# Allegro board 2019-08-18-2.brd
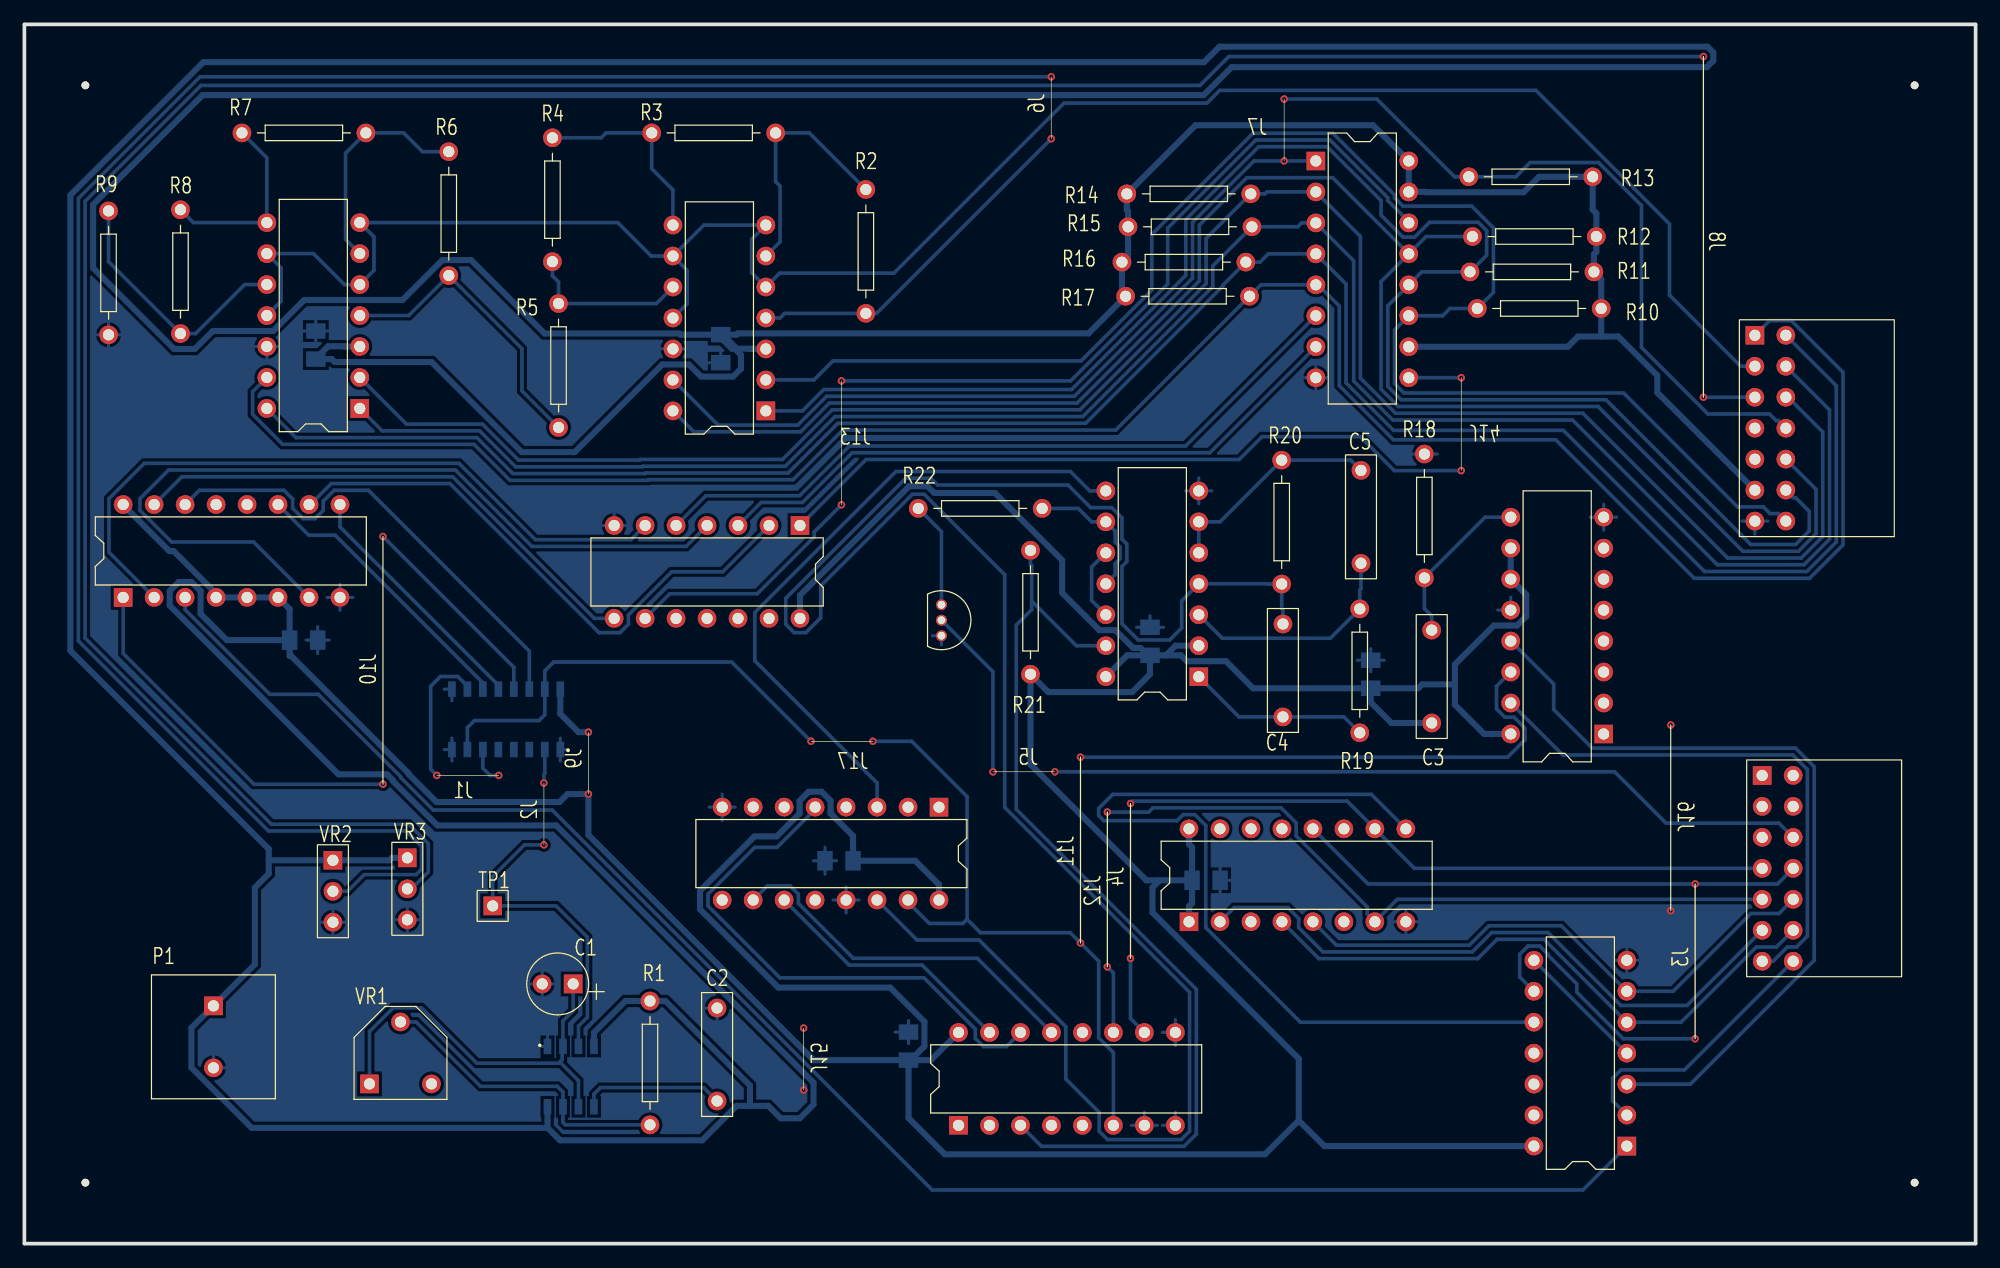
[diagram p0: board, top side]
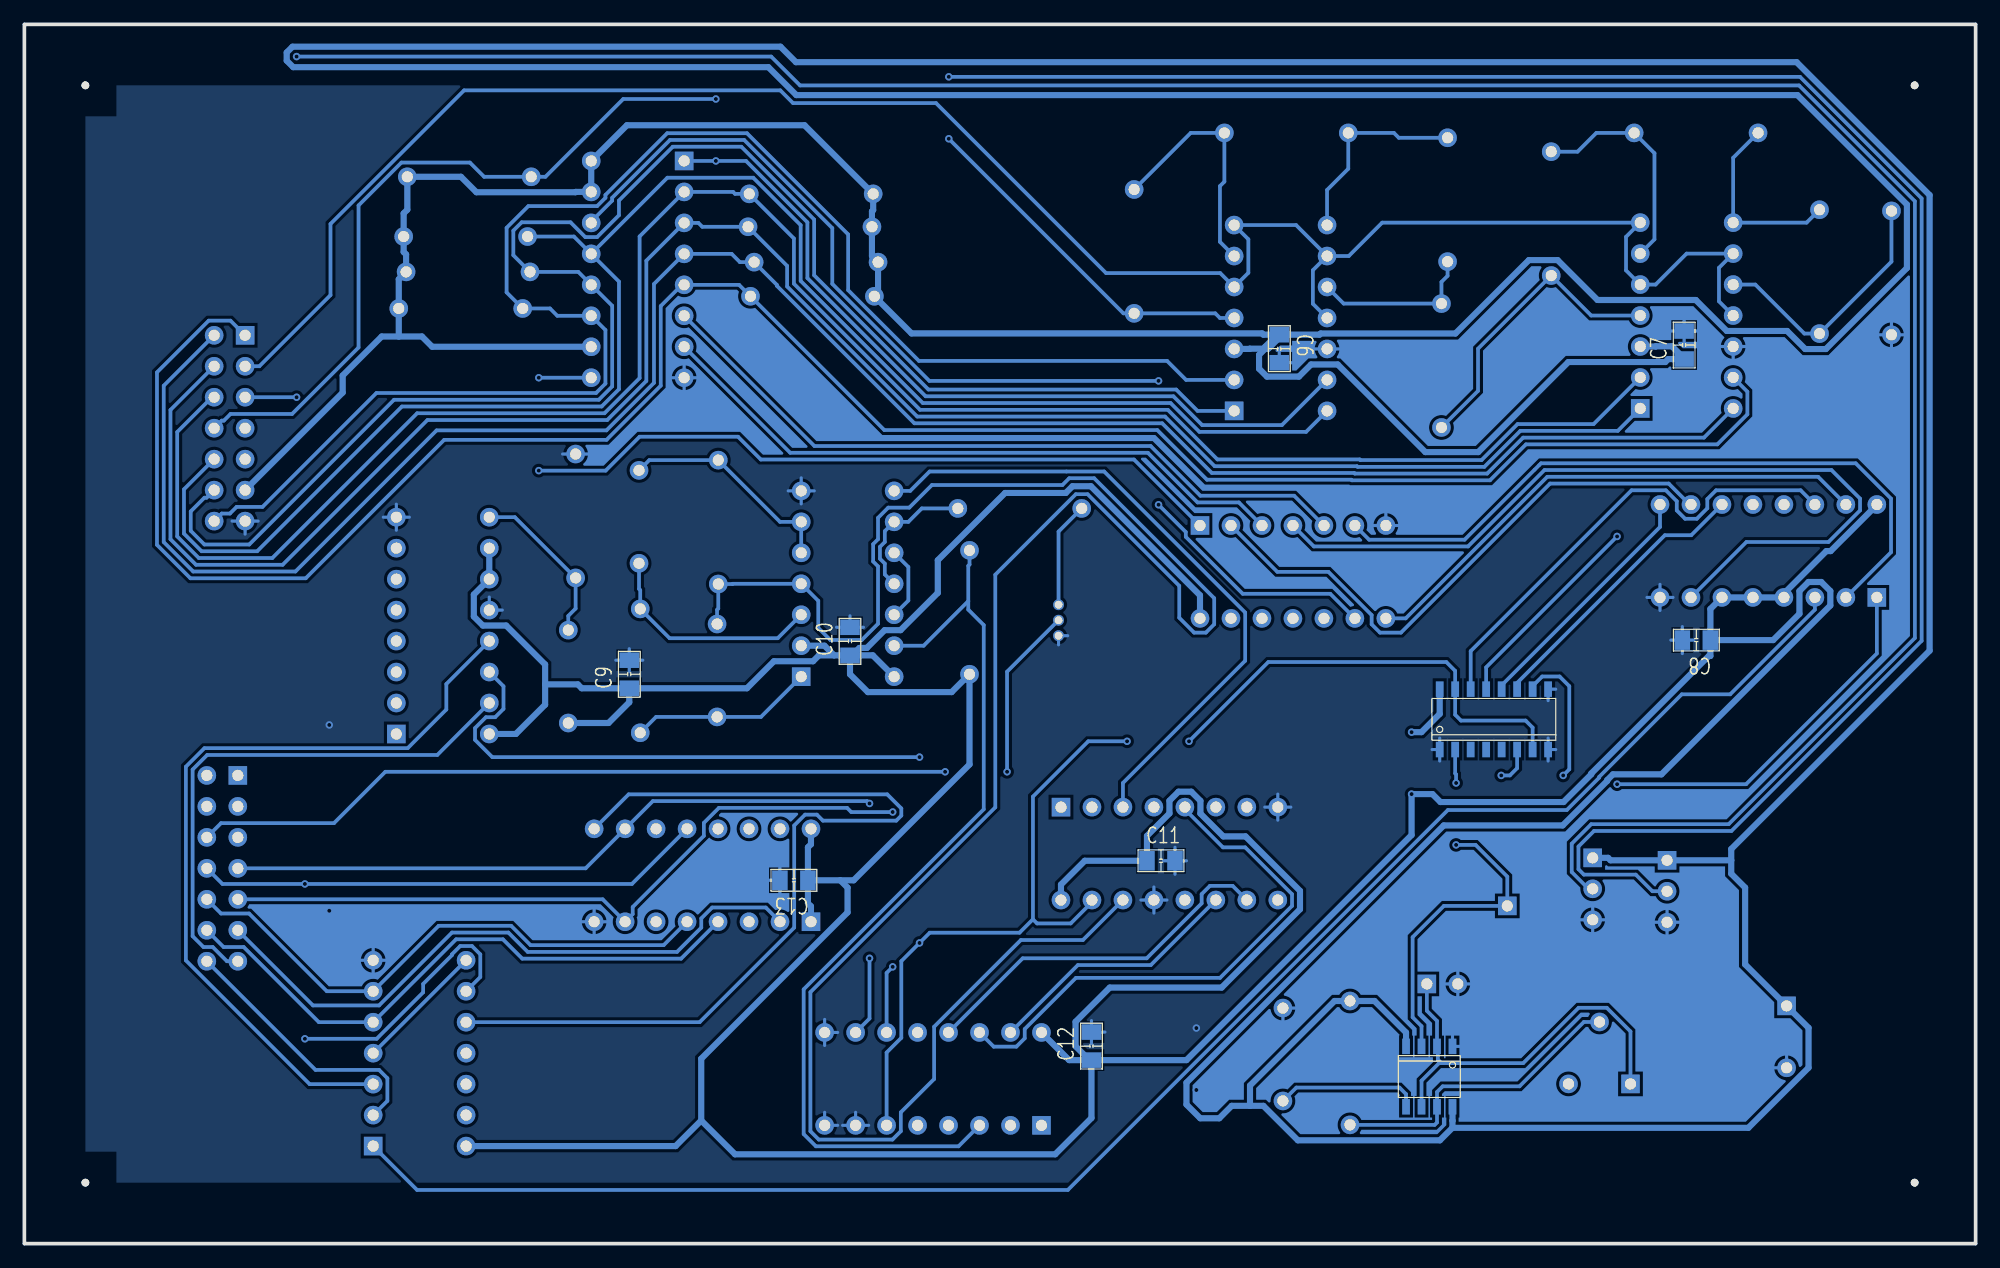
[diagram p1: board, bottom side, seen from below]

Outline 160 x 100 mm; copper layers: TOP, BOTTOM. Coordinates in mm from the lower left corner of the outline.
Outline path: 0,100 0,0 160,0 160,100 0,100

## Design rules (mm)
nets with their own width: min track width 0.5; nets +5V GND

## Placement (name value [footprint] x y rotation side)
C1  10uF  [CAP196]  45 21.3 90 top
C2  0.1uF  [CAP300]  56.8 11.7 90 top
C3  0.1uF  [CAP300]  115.4 42.7 90 top
C4  0.1uF  [CAP300]  103.2 43.2 90 top
C5  0.1uF  [CAP300]  109.6 55.8 90 top
C6  0.1uF  [SMDCAP]  57.1 74.4 270 bottom
C7  0.1uF  [SMDCAP]  23.9 72.7 90 bottom
C8  0.1uF  [SMDCAP]  21.9 49.5 0 bottom
C9  0.1uF  [SMDCAP]  110.4 45.7 90 bottom
C10  0.1uF  [SMDCAP]  92.3 48.4 90 bottom
C11  0.1uF  [SMDCAP]  67.8 31.4 180 bottom
C12  0.1uF  [SMDCAP]  72.5 15.2 90 bottom
C13  0.1uF  [SMDCAP]  95.9 29.8 0 bottom
J1  -  [1]  38.9 38.4 180 bottom
J2  -  [1]  42.6 37.78 270 bottom
J3  -  [4]  137 29.5 270 bottom
J4  -  [4]  90.7 36.1 270 bottom
J5  -  [1]  84.5 38.7 180 bottom
J6  -  [1]  84.2 95.7 270 bottom
J7  -  [1]  103.3 88.8 90 bottom
J8  -  [10]  137.68 69.42 90 bottom
J9  -  [1]  46.25 41.95 270 bottom
J10  -  [7]  29.4 58 270 bottom
J11  -  [5]  86.6 39.9 270 bottom
J12  -  [4]  88.8 35.4 270 bottom
J13  -  [3]  67 60.6 90 bottom
J14  -  [2]  117.82 71.02 270 bottom
J15  -  [1]  63.9 12.6 90 bottom
J16  -  [5]  135 27.3 90 bottom
J17  -  [1]  64.5 41.2 0 bottom
NOREF  -  [unnamed]  155 5 0 top
NOREF#2  -  [unnamed]  5 5 0 top
NOREF#3  -  [unnamed]  5 95 0 top
NOREF#4  -  [unnamed]  155 95 0 top
P1  CON2  [2P]  15.5 19.5 0 top
P2  CON14  [JUMPER14]  141.9 74.5 270 top
P3  CON14  [JUMPER14]  142.5 38.4 270 top
Q1  2SC1815  [TO92]  75.2 52.4 0 top
R1  10K  [RES400]  51.3 19.9 270 top
R2  10K  [RES400]  69 76.3 90 top
R3  10K  [RES400]  61.6 91.1 180 top
R4  10K  [RES400]  43.3 90.7 270 top
R5  10K  [RES400]  43.8 77.1 270 top
R6  10K  [RES400]  34.8 79.4 90 top
R7  10K  [RES400]  28 91.1 180 top
R8  10K  [RES400]  12.8 84.8 270 top
R9  10K  [RES400]  6.9 84.7 270 top
R10  10K  [RES400]  129.3 76.7 180 top
R11  10K  [RES400]  128.7 79.7 180 top
R12  10K  [RES400]  128.9 82.6 180 top
R13  10K  [RES400]  128.6 87.5 180 top
R14  10K  [RES400]  90.4 86.1 0 top
R15  10K  [RES400]  90.5 83.4 0 top
R16  10K  [RES400]  90 80.5 0 top
R17  10K  [RES400]  90.3 77.7 0 top
R18  10K  [RES400]  114.8 54.6 90 top
R19  10K  [RES400]  109.5 41.9 90 top
R20  10K  [RES400]  103.1 54.1 90 top
R21  10K  [RES400]  82.5 46.7 90 top
R22  10K  [RES400]  73.3 60.3 0 top
TP1  TP  [JUMPER1]  38.4 27.7 0 top
U1  NE555  [SOIC8]  44.8 13.7 270 bottom
U2  LM339  [DIP14_3]  60.8 68.3 180 top
U3  LM339  [DIP14_3]  27.5 68.5 180 top
U4  40147  [DIP16_3]  105.9 88.8 0 top
U5  4069  [DIP14_3]  63.6 58.9 270 top
U6  4518  [SOIC16]  39.5 43 90 bottom
U7  4585  [DIP16_3]  8.1 53 90 top
U8  4027  [DIP16_3]  129.5 41.8 180 top
U9  4071  [DIP14_3]  131.4 8 180 top
U10  4001  [DIP14_3]  96.3 46.5 180 top
U11  4017  [DIP16_3]  75 35.8 270 top
U12  4051  [DIP16_3]  76.6 9.7 90 top
U13  4175  [DIP16_3]  95.5 26.4 90 top
VR1  1M  [VR1]  28.3 13.1 0 top
VR2  10K  [VR2]  25.3 28.9 0 top
VR3  10K  [VR2]  31.4 29.1 0 top

## Library data of the parts
C1 = Cap POL
C2-C5 = Cap NP
C6-C13 = Cap TEXT
J1-J17 = JUMPER
P1 = CON2
P2 P3 = CON14
Q1 = 2SC1815
R1-R22 = resistor
TP1 = TP
U1 = NE555: Tolerance: ***; User Part Number: ***
U2 U3 = LM339: Tolerance: ***; User Part Number: ***
U4 = 40147: Tolerance: ***; User Part Number: ***
U5 = 4069: Tolerance: ***; User Part Number: ***
U6 = 4518: Tolerance: ***; User Part Number: ***
U7 = 4585: Tolerance: ***; User Part Number: ***
U8 = 4027: Tolerance: ***; User Part Number: ***
U9 = 4071: Tolerance: ***; User Part Number: ***
U10 = 4001: Tolerance: ***; User Part Number: ***
U11 = 4017: Tolerance: ***; User Part Number: ***
U12 = 4051: Tolerance: ***; User Part Number: ***
U13 = 4175: Tolerance: ***; User Part Number: ***
VR1 = VR1
VR2 VR3 = VR2

## Footprints (pads in the part's own frame, mm; a bottom-side part is the same pattern mirrored in y, then rotated)
2P
  rect 1.524x1.524 hole 0.914: 1(0,0)
  round 1.524 hole 0.914: 2(0,-5.08)
CAP196
  rect 1.524x1.524 hole 0.914: 1(0,0)
  round 1.524 hole 0.914: 2(0,2.54)
CAP300
  round 1.524 hole 0.914: 1(0,0) 2(7.62,0)
DIP14_3
  rect 1.524x1.524 hole 0.914: 1(0,0)
  round 1.524 hole 0.914: 2(0,-2.54) 3(0,-5.08) 4(0,-7.62) 5(0,-10.16) 6(0,-12.7) 7(0,-15.24) 8(7.62,-15.24) 9(7.62,-12.7) 10(7.62,-10.16) 11(7.62,-7.62) 12(7.62,-5.08) 13(7.62,-2.54) 14(7.62,0)
DIP16_3
  rect 1.524x1.524 hole 0.914: 1(0,0)
  round 1.524 hole 0.914: 2(0,-2.54) 3(0,-5.08) 4(0,-7.62) 5(0,-10.16) 6(0,-12.7) 7(0,-15.24) 8(0,-17.78) 9(7.62,-17.78) 10(7.62,-15.24) 11(7.62,-12.7) 12(7.62,-10.16) 13(7.62,-7.62) 14(7.62,-5.08) 15(7.62,-2.54) 16(7.62,0)
JUMPER1
  rect 1.524x1.524 hole 0.914: 1(0,0)
JUMPER14
  rect 1.524x1.524 hole 0.914: 1(0,0)
  round 1.524 hole 0.914: 2(0,2.54) 3(2.54,0) 4(2.54,2.54) 5(5.08,0) 6(5.08,2.54) 7(7.62,0) 8(7.62,2.54) 9(10.16,0) 10(10.16,2.54) 11(12.7,0) 12(12.7,2.54) 13(15.24,0) 14(15.24,2.54)
RES400
  round 1.524 hole 0.914: 1(0,0) 2(10.16,0)
SMDCAP
  rect 1.27x1.6 smd: 1(-0.15,0) 2(2.15,0)
SOIC8
  rect 1.27x0.635 smd: 1(-2.476,1.905) 2(-2.476,0.635) 3(-2.476,-0.635) 4(-2.476,-1.905) 5(2.476,-1.905) 6(2.476,-0.635) 7(2.476,0.635) 8(2.476,1.905)
SOIC16
  rect 1.27x0.635 smd: 1(-2.476,4.445) 2(-2.476,3.175) 3(-2.476,1.905) 4(-2.476,0.635) 5(-2.476,-0.635) 6(-2.476,-1.905) 7(-2.476,-3.175) 8(-2.476,-4.445) 9(2.476,-4.445) 10(2.476,-3.175) 11(2.476,-1.905) 12(2.476,-0.635) 13(2.476,0.635) 14(2.476,1.905) 15(2.476,3.175) 16(2.476,4.445)
TO92
  round 0.889 hole 0.635: 1(0,0) 2(0,-1.27) 3(0,-2.54)
unnamed
  round 0.635 hole 3.175 unplated: (0,0)
VR1
  rect 1.524x1.524 hole 0.914: 1(0,0)
  round 1.524 hole 0.914: 2(2.54,5.08) 3(5.08,0)
VR2
  rect 1.524x1.524 hole 0.914: 1(0,2.54)
  round 1.524 hole 0.914: 2(0,0) 3(0,-2.54)

## Nets
+5V: C3.1 C6.1 C7.1 C8.1 C9.1 C10.1 C11.1 C12.1 C13.1 P1.1 P2.11 R1.1 R10.1 R11.1 R12.1 R13.1 R14.1 R15.1 R16.1 R17.1 R21.1 U1.4(RST) U1.8(VCC) U2.3 U3.3 U4.10(I\9\) U4.15(I\0\) U4.16(VCC) U5.14 U6.16 U7.4(A>BIN) U7.5(A<BIN) U7.6(A=BIN) U7.16(VCC) U8.10(J) U8.11(K) U8.16 U9.14 U10.2(I1) U10.14 U11.16(VCC) U12.16(VCC) U13.1(R\S\T\) U13.16(VCC) VR2.1(A) VR3.1(A)
GND: C1.2 C2.2 C6.2 C7.2 C8.2 C9.2 C10.2 C11.2 C12.2 C13.2 P1.2 P2.13 Q1.3(B) R9.2 R18.2 U1.1(GND) U2.12 U3.12 U4.8(GND) U5.7 U6.1(CLK) U6.8 U6.9(CLK) U7.8(GND) U8.8 U8.12(RST) U9.7 U10.7 U11.8(GND) U11.13(C\K\E\N\) U12.7(VEE) U12.8(GND) U12.9(C) U13.8(GND) VR2.3(WIPER) VR3.3(WIPER)
ADC0: P2.14 R10.2 U2.2(OUT) U4.11(I\1\)
ADC1: P2.12 R11.2 U2.1(OUT) U4.12(I\2\)
ADC2: P2.10 R12.2 U2.14(OUT) U4.13(I\3\)
ADC3: P2.8 R13.2 U2.13(OUT) U4.1(I\4\)
ADC4: P2.6 R14.2 U3.2(OUT) U4.2(I\5\)
ADC5: P2.4 R15.2 U3.1(OUT) U4.3(I\6\)
ADC6: P2.2 R16.2 U3.14(OUT) U4.4(I\7\)
ADC7: P2.1 R17.2 U3.13(OUT) U4.5(I\8\)
CLK: TP1.1 U1.3(OUT) U6.2(EN)
MOTOR-GND: P3.6 Q1.2(C)
MR: U6.7(CLR) U6.15(CLR) U8.14(Q\) U11.15(RST) U12.6(E\N\)
MR2: P3.13 U8.15(Q)
SW1: P3.14 U9.2(I1)
SW2: P3.12 U9.5(I0) U13.4(D0)
SW3: P3.10 U9.6(I1) U13.5(D1)
SW4: P3.8 U9.9(I1) U13.12(D2)
SWLED1: P3.11 U13.2(Q0)
SWLED2: P3.9 U12.11(A) U13.7(Q1)
SWLED3: P3.7 U12.10(B) U13.10(Q2)
VR3: P2.5 VR3.2(B)
VR-LED: P2.3 U2.5(+IN) U2.7(+IN) U2.9(+IN) U2.11(+IN) U3.5(+IN) U3.7(+IN) U3.9(+IN) U3.11(+IN)
N01738: R2.2 R3.1 U2.6(-IN)
N01745: R2.1 U2.4(-IN) VR2.2(B)
N01788: R3.2 R4.1 U2.8(-IN)
N01863: R4.2 R5.1 U2.10(-IN)
N01938: R5.2 R6.1 U3.4(-IN)
N02013: R6.2 R7.1 U3.6(-IN)
N02099: R7.2 R8.1 U3.8(-IN)
N02959: R8.2 R9.1 U3.10(-IN)
N05183: U4.9(A\) U5.1(I)
N05210: U4.7(B\) U5.3(I)
N05222: U4.6(C\) U5.5(I)
N05234: U4.14(D\) U5.9(I)
N05246: U5.2(O) U7.10(A0)
N05283: U5.4(O) U7.7(A1)
N05295: U5.6(O) U7.2(A2)
N05307: U5.8(O) U7.15(A3)
N05494: U7.3(A=BOUT) U9.1(I0)
N05551: U6.11(Q0) U7.11(B0)
N05553: U6.12(Q1) U7.9(B1)
N05555: U6.13(Q2) U7.1(B2)
N05557: U6.14(Q3) U7.14(B3)
N06357: R1.2 U1.7(DISC) VR1.2
N06361: C1.1 U1.2(TRIG) U1.6(THR) VR1.1
N07130: U8.13(CLK) U9.3(O)
N07335: C3.2 R18.1 U8.9(SET)
N07588: C2.1 U1.5(CV)
N08311: U6.6(Q3) U6.10(EN)
N11638: C4.1 R19.1 U10.1(I0)
N11666: C4.2 R20.1 U10.4(O) U11.14(CLK)
N11691: C5.2 R20.2 U10.5(I0) U10.6(I1)
N11734: C5.1 R19.2 U10.3(O)
N11895: U11.11(9) U12.15(X2)
N11956: U11.5(6) U12.14(X1)
N11968: U11.10(4) U12.13(X0)
N11980: U10.8(I0) U11.3(0)
N12001: R21.2 U10.13(I1) U12.3(X)
N12045: U10.10(O) U10.12(I0)
N12067: R22.2 U10.9(I1) U10.11(O)
N12155: Q1.1(E) R22.1
N14271: U9.10(O) U13.9(CLK)
N14317: U9.4(O) U9.8(I0)

Pads without a net: P2 7 9; P3 1 2 3 4 5; U5 10 11 12 13; U6 3 4 5; U7 12 13; U8 1 2 3 4 5 6 7; U9 11 12 13; U11 1 2 4 6 7 9 12; U12 1 2 4 5 12; U13 3 6 11 13 14 15; VR1 3

## Via types
v1: diameter 0.61, hole 0.33, TOP to BOTTOM, 34 vias

## Routing (per net, layer and track width the routed paths; a pad name or vN(x,y) marks a point on that pad's centre or on a via; arc(x,y) is an arc through that point)
+5V: length 1176.7
  BOTTOM w0.5: U6.16 43.95,43.45 45.44,41.95 v1(46.25,41.95) ; C9.1 114.3,45.55 114.62,45.87 117.3,45.87 ; C9.1 100.75,45.55 98.53,47.77 95.33,47.77 94.84,48.25 93.6,48.25 ; C9.1 110.4,44.4 112.1,42.7 C3.1 ; 92.14,48.25 91.53,48.86 90.92,48.86 89.46,50.31 88.16,50.31 85.1,53.37 85.1,56.05 79.58,61.57 74.61,61.57 74.06,62.12 72.55,62.12 63.6,53.17 U5.14 ; 92.14,48.25 C10.1 ; 92.14,48.25 90.43,48.25 U10.14 ; U4.10 126.56,73.56 127.4,74.4 129.3,74.4 ; 20.04,31.44 20.04,30.34 18.9,29.2 18.9,22.9 P1.1 13.7,17.7 13.7,14.43 18.63,9.5 42.9,9.5 42.9,9.5 ; 20.04,31.44 20.04,32.36 3.77,48.63 3.77,86 14.68,96.9 96.73,96.9 98,98.17 138.02,98.17 138.49,97.7 138.49,97.02 137.96,96.49 98.99,96.49 96.7,94.2 14.61,94.2 5.63,85.22 5.63,80.02 12.28,73.37 13.97,73.37 15.45,74.85 20.41,74.85 22.95,77.39 31,77.39 34.27,80.67 36.63,80.67 42.65,74.65 53.7,74.65 53.8,74.55 C6.1 ; 20.04,31.44 VR2.1 29.93,31.44 30.13,31.64 VR3.1 ; 104.5,10.1 106.6,8 U9.14 ; 104.5,10.1 104.5,15.16 92.5,27.16 92.5,29.2 93.1,29.8 ; 104.5,10.1 101.73,7.33 75.47,7.33 72.5,10.3 C12.1 ; C13.1 95.75,27.92 95.5,27.67 U13.1 ; C13.1 95.75,32.5 95.5,32.75 U13.16 ; C13.1 93.1,29.8 ; 129.3,74.4 R10.1 129.3,79.1 R11.1 128.7,81.13 128.9,81.33 R12.1 128.9,84.5 128.6,84.8 R13.1 124.2,87.5 122.93,86.23 114.81,86.23 114.79,86.26 U4.15 U4.16 110.59,91.73 96.03,91.73 R14.1 90.4,84.77 90.5,84.67 R15.1 90.5,81 R16.1 90,78 R17.1 87.25,74.65 58.51,74.65 58.4,74.55 57.27,74.55 ; 129.3,74.4 130.7,74.4 133.9,71.2 133.9,69.8 P2.11 ; 117.3,45.87 117.3,44.2 119.7,41.8 U8.16 ; 117.3,45.87 117.3,47.5 120.49,50.69 122.41,50.69 123.15,51.44 123.15,53.23 U8.11 U8.10 ; C12.1 72.67,15.05 ; C12.1 64.71,15.05 46.25,33.51 v1(46.25,36.87) 44.54,36.87 43.88,36.22 33.79,36.22 31.52,38.49 31.52,38.56 21.88,48.2 21.75,48.2 C8.1 ; 72.67,15.05 74.33,15.05 U12.16 ; 72.67,15.05 73.8,16.19 73.8,18.19 71,21 61.83,21 55.4,27.43 55.4,28.93 59.87,33.4 61.69,33.4 63.57,35.27 63.57,36.32 64.31,37.07 65.36,37.07 66.11,36.33 66.11,35.28 67.95,33.44 C11.1 73.05,31.4 75,29.45 U11.16 ; 59.5,11.3 59.5,12.97 52.57,19.9 R1.1 49.29,19.9 46.7,17.32 U1.4 ; 59.5,11.3 61,11.3 62.02,10.28 63.58,10.28 64.71,11.41 64.71,13.2 43.61,34.3 33.86,34.3 30.21,37.95 30.21,38.02 29.74,38.49 25.76,38.49 11.91,52.34 11.91,53.52 12.65,54.27 13.71,54.27 14.45,53.52 14.45,51.65 16.6,49.5 C8.1 ; 59.5,11.3 58.4,11.3 55.57,8.47 43.93,8.47 42.9,9.5 ; 93.6,48.25 94.39,49.04 U10.2 ; 93.6,48.25 C10.1 ; 93.1,29.8 92,29.8 82.5,39.3 R21.1 83.97,45.23 90.83,45.23 92.3,46.7 C10.1 ; 42.9,9.5 42.9,10.08 42.9,10.09 42.9,11.22 ; 57.27,74.55 C6.1 ; 57.27,74.55 58.26,73.56 58.26,73.39 58.76,72.89 58.76,71.76 58.11,71.11 55.49,71.11 54.49,72.11 52.31,72.11 45.12,64.92 40.78,64.92 33.4,72.31 25.45,72.31 25.2,72.55 C7.1 23.9,72.6 24.9,73.6 26.21,73.6 26.23,73.58 U3.3 ; C6.1 57.1,74.3 58,73.4 59.51,73.4 59.53,73.38 U2.3 ; C8.1 21.75,52.05 U7.6 U7.5 U7.4 15.72,53.32 12.24,56.8 11.89,56.8 8.1,60.59 U7.16
GND: length 117.6
  BOTTOM w0.254: U12.9 94.38,18.39 ; U12.9 93.31,17.32 ; U12.9 94.38,16.25 ; 66.31,28.18 U11.13 ; U11.13 67.38,27.11 ; U11.13 68.45,28.18 ; U11.13 67.38,29.25 ; 52.11,73.38 U2.12 54.25,73.38 ; 6.9,73.47 R9.2 ; R9.2 6.9,75.61 ; R9.2 7.97,74.54 ; R9.2 5.83,74.54 ; 128.43,59.58 U8.8 ; U8.8 130.57,59.58 ; U8.8 129.5,60.65 ; U8.8 129.5,58.51 ; U6.1 44.57,40.52 ; U6.1 43.95,41.47 ; U6.1 43.95,39.58 ; C11.2 65.65,32.51 ; C11.2 65.65,30.29 ; C11.2 66.59,31.4 ; C11.2 64.71,31.4 ; 42.46,20.23 C1.2 ; C1.2 42.46,22.37 ; C1.2 43.53,21.3 ; C1.2 41.39,21.3 ; 94.38,10.77 U12.8 93.31,9.7 ; C13.2 98.99,29.8 ; C13.2 98.05,28.69 ; C13.2 98.05,30.91 ; U11.8 57.22,36.87 ; U11.8 57.22,34.73 ; U11.8 58.29,35.8 ; U11.8 56.15,35.8 ; U5.7 49.43,58.9 ; U5.7 47.29,58.9 ; U5.7 48.36,59.97 ; 55.99,72.25 C6.2 57.1,73.19 ; VR2.3 25.3,27.43 ; VR2.3 26.37,26.36 ; VR2.3 24.23,26.36 ; VR2.3 25.3,25.29 ; 16.57,14.42 P1.2 15.5,15.49 ; U12.7 91.84,10.77 ; U12.7 90.77,9.7 ; U12.7 92.91,9.7 ; 115.87,64.76 R18.2 113.73,64.76 ; 105.9,69.95 U4.8 ; U4.8 106.97,71.02 ; U4.8 105.9,72.09 ; U4.8 104.83,71.02 ; U10.7 96.3,62.81 ; U10.7 96.3,60.67 ; U10.7 95.23,61.74 ; U10.7 97.37,61.74 ; 113.28,25.33 U13.8 ; U13.8 112.21,26.4 ; U13.8 114.35,26.4 ; U13.8 113.28,27.47 ; 24.05,48.39 C8.2 ; C8.2 24.99,49.5 ; C8.2 24.05,50.61 ; C8.2 23.11,49.5 ; U9.7 132.47,23.24 ; U9.7 130.33,23.24 ; U9.7 131.4,22.17 ; U9.7 131.4,24.31 ; C10.2 93.41,50.55 ; C10.2 92.3,51.49 ; C10.2 91.19,50.55 ; U7.8 26.95,53 ; U7.8 24.81,53 ; U7.8 25.88,51.93 ; U7.8 25.88,54.07 ; P2.13 142.97,59.26 ; P2.13 140.83,59.26 ; P2.13 141.9,58.19 ; 75.2,49.11 Q1.3 74.45,49.86 ; 31.4,25.49 VR3.3 ; VR3.3 30.33,26.56 ; VR3.3 32.47,26.56 ; VR3.3 31.4,27.63 ; 34.43,45.48 U6.9 35.05,44.53 ; 23.9,73.91 C7.2 ; C7.2 25.01,74.85 ; C7.2 23.9,75.79 ; C7.2 22.79,74.85 ; 109.29,47.85 C9.2 ; C9.2 111.51,47.85 ; C9.2 110.4,46.91 ; C9.2 110.4,48.79 ; 72.5,16.41 C12.2 ; C12.2 71.39,17.35 ; C12.2 72.5,18.29 ; 19.88,72.51 U3.12 ; U3.12 18.81,73.58 ; U3.12 20.95,73.58 ; 35.05,39.58 U6.8 ; U6.8 35.05,41.47 ; U6.8 34.43,40.52 ; 42.9,17.12 42.9,16.18 42.27,16.18 ; 120.81,51.96 U8.12 121.88,53.03 ; 55.73,19.32 C2.2 56.8,18.25
  vias: v1(63.9,17.68) v1(63.9,12.6) v1(135,42.54) v1(135,27.3)
ADC0: length 129.9
  BOTTOM w0.3: P2.14 143.82,59.88 143.14,59.88 142.6,60.43 140.47,60.43 131.13,69.77 113.12,69.77 112.35,70.54 112.35,74.93 U4.11 116.3,76.1 116.9,76.7 R10.2 120.46,78.02 120.46,83.31 118.68,85.09 113.04,85.09 112.35,85.78 112.35,86.01 107.29,91.07 100.75,91.07 92.45,82.78 92.45,78.2 86.65,72.4 66.3,72.4 64.74,70.84 U2.2
ADC1: length 138.4
  BOTTOM w0.3: U2.1 63.8,68.3 65.55,70.05 85.87,70.05 95.24,79.42 95.24,84 101.21,89.97 106.83,89.97 111.25,85.55 111.25,84.34 113.04,82.55 114,82.55 115.22,83.77 119.22,83.77 119.91,83.08 119.91,81.07 R11.2 114.58,79.7 U4.12 111.8,76.92 111.8,70.31 112.89,69.21 129.69,69.21 141.56,57.34 145.24,57.34 146.36,58.46 146.36,60.06 145.24,61.18 145.06,61.18 P2.12
ADC2: length 141.7
  BOTTOM w0.3: R12.2 114.94,82.6 U4.13 ; P2.10 146.91,61.87 146.91,58.23 145.47,56.79 140.91,56.79 129.04,68.66 112.67,68.66 111.25,70.08 111.25,78.91 U4.13 ; U2.14 54.9,66.58 63.65,66.58 66.01,68.94 86.33,68.94 96.35,78.96 96.35,83.53 100.24,87.43 107.27,87.43 U4.13
ADC3: length 126
  BOTTOM w0.3: v1(103.3,93.88) 110.89,93.88 117.27,87.5 R13.2 122.3,87.5 123.47,88.67 129.08,88.67 132.6,85.15 132.6,73.5 138.05,68.05 143.1,68.05 143.64,67.5 143.82,67.5 P2.8 ; U4.1 v1(103.3,88.8) 100.83,88.8 95.79,83.77 95.79,79.19 86.1,69.5 65.78,69.5 63.42,67.13 56.89,67.13 U2.13
ADC4: length 166.8
  BOTTOM w0.3: P2.6 144.62,69.42 147.47,66.57 147.47,58 145.7,56.23 139.67,56.23 127.8,68.1 112.44,68.1 109.55,70.98 109.55,82.61 U4.2 101.89,86.26 101.73,86.1 R14.2 96.9,82.44 96.9,78.73 86.56,68.39 66.24,68.39 62.17,64.32 50.5,64.32 50.45,64.27 40.51,64.27 37.56,67.22 31.32,67.22 U3.2
ADC5: length 165.7
  BOTTOM w0.3: P2.4 148.02,68.38 148.02,57.77 145.93,55.68 138.82,55.68 126.95,67.55 112.2,67.55 109,70.75 109,80.62 U4.3 104.73,83.72 104.41,83.4 R15.2 97.45,80.19 97.45,78.5 86.79,67.83 66.47,67.83 62.4,63.76 50.73,63.76 50.68,63.71 40.28,63.71 37.33,66.66 29.34,66.66 U3.1
ADC6: length 173.6
  BOTTOM w0.3: U3.14 22.27,66.11 37.1,66.11 40.05,63.16 50.91,63.16 50.96,63.21 62.63,63.21 66.7,67.28 87.02,67.28 98.3,78.56 98.3,78.64 R16.2 101.33,80.5 102.01,81.18 U4.4 108.37,78.71 108.37,70.6 112.27,66.7 126.2,66.7 137.78,55.12 146.16,55.12 148.58,57.54 148.58,70.36 P2.2
ADC7: length 181.4
  BOTTOM w0.3: P2.1 143.1,75.7 144.89,75.7 149.13,71.46 149.13,57.31 146.39,54.57 136.93,54.57 125.57,65.93 112.26,65.93 107.82,70.37 107.82,76.9 106.08,78.64 U4.5 101.4,78.64 R17.2 89.49,66.73 67.1,66.73 63.03,62.65 51.19,62.65 51.14,62.6 39.82,62.6 36.87,65.55 21.18,65.55 18.71,68.02 18.71,69.87 U3.13
CLK: length 28.5
  BOTTOM w0.3: v1(42.6,37.78) 42.6,38.49 42.67,38.56 U6.2 ; 45.44,16.18 45.44,17.84 46.17,18.57 46.17,25.13 43.6,27.7 TP1.1 38.4,30.1 41,32.7 v1(42.6,32.7)
MOTOR-GND: length 76.9
  BOTTOM w0.3: v1(79.42,38.7) 79.42,46.91 Q1.2 ; P3.6 143.87,34.49 134.61,34.49 130.4,38.7 v1(84.5,38.7)
MR: length 133.2
  BOTTOM w0.3: 77.3,26.6 76.96,26.26 74.2,26.26 72.46,28 U11.15 ; 77.3,26.6 78.4,25.5 85.76,25.5 v1(86.6,24.66) 88.09,23.17 88.09,16.88 89.3,15.67 U12.6 ; 77.3,26.6 77.3,36.66 72.76,41.2 v1(69.58,41.2) ; v1(64.5,41.2) 58,47.7 43.4,47.7 42.67,46.98 U6.15 42.67,43.38 42.2,42.9 36.9,42.9 36.33,42.33 U6.7 ; v1(86.6,39.9) 121.63,39.9 123.05,41.32 123.05,42.28 122.16,43.17 121.4,43.17 120.71,43.86 120.71,45.71 U8.14
MR2: length 44.8
  BOTTOM w0.3: U8.15 126.14,40.08 145.01,40.08 146.21,38.88 146.21,25.22 145.31,24.33 144.56,24.33 143.39,23.16 P3.13
SW1: length 22.3
  BOTTOM w0.3: P3.14 136.13,14.25 130.92,14.25 130.23,13.56 130.23,11.71 U9.2
SW2: length 49.8
  BOTTOM w0.3: U13.4 106.15,23.37 119.17,23.37 120.76,24.96 124.6,24.96 U9.5 135.85,18.16 142.02,24.33 143.67,24.33 P3.12
SW3: length 46.2
  BOTTOM w0.3: P3.10 143.87,27.07 141.57,27.07 135.2,20.7 U9.6 126.03,26.07 120.08,26.07 118.5,24.48 107.58,24.48 U13.5
SW4: length 63.6
  BOTTOM w0.3: U9.9 122.61,21.87 122.61,23.72 123.3,24.41 124.26,24.41 124.95,23.72 124.95,23.65 127.3,21.3 127.3,20.61 131.11,16.8 v1(137,16.8) ; U13.12 110.18,29.5 v1(137,29.5) 143.76,29.5 P3.8
SWLED1: length 52.6
  BOTTOM w0.3: U13.2 99.21,27.57 103.6,27.57 104.49,26.68 104.49,25.92 106.48,23.93 118.73,23.93 120.31,25.51 124.94,25.51 130.92,19.53 136.33,19.53 P3.11
SWLED2: length 65
  BOTTOM w0.3: U12.11 89.3,22.2 v1(88.8,22.7) ; v1(88.8,35.4) 88.81,35.39 92.19,35.39 92.54,35.74 103.05,35.74 104.29,34.5 104.29,33.44 110.12,27.61 110.12,27.02 U13.7 112.58,28.24 P3.9
SWLED3: length 60.7
  BOTTOM w0.3: P3.7 113.98,30.78 U13.10 108.47,36.29 90.89,36.29 v1(90.7,36.1) ; v1(90.7,23.4) 90.7,18.46 U12.10
VR3: length 217.4
  BOTTOM w0.3: v1(137.68,97.36) 98.76,97.36 96.39,94.99 14.47,94.99 4.98,85.5 4.98,49.67 20.25,34.4 31.52,34.4 33.12,32.8 33.12,30.48 31.74,29.1 VR3.2 ; P2.5 v1(137.68,69.42)
VR-LED: length 168.9
  BOTTOM w0.3: U2.9 55.72,83.54 U2.7 59.63,82.37 59.63,79.63 U2.5 61.94,79.6 71.3,79.6 85.25,93.55 96.97,93.55 98.01,94.59 123.94,94.59 134.9,83.63 134.9,77.79 140.73,71.96 P2.3 ; U2.9 54.35,79.83 54.35,77.09 U2.11 ; U2.9 51.4,81 48.66,83.74 U3.7 28.67,82.57 28.67,79.83 U3.5 26.24,78.66 23.7,81.2 U3.9 21.05,80.03 21.05,77.29 U3.11
N01738: length 20.1
  BOTTOM w0.3: U2.6 61.97,82.17 61.97,86.73 61.6,87.1 R3.1 64.36,91.1 R2.2
N01745: length 194.7
  BOTTOM w0.3: U2.4 61.97,75.92 62.35,76.3 R2.1 69.88,76.3 v1(84.2,90.62) ; v1(84.2,95.7) 14.4,95.7 4.43,85.73 4.43,49.44 20.02,33.85 31.29,33.85 32.57,32.57 32.57,30.71 32.12,30.27 27.87,30.27 26.5,28.9 VR2.2
N01788: length 16.6
  BOTTOM w0.3: U2.8 53.18,86.42 51.44,88.16 R3.2 47.7,91.1 47.3,90.7 R4.1
N01863: length 13.6
  BOTTOM w0.3: U2.10 51.82,77.1 R5.1 43.8,78.87 43.3,79.37 R4.2
N01938: length 24.8
  BOTTOM w0.3: R5.2 40.8,69.94 40.8,73.4 R6.1 31.52,76.12 U3.4
N02013: length 18.5
  BOTTOM w0.3: R6.2 32.64,89.56 31.1,91.1 R7.1 26.33,89.43 26.33,82.37 U3.6
N02099: length 15.7
  BOTTOM w0.3: R8.1 13.86,83.74 U3.8 19.88,89.06 R7.2
N02959: length 21.2
  BOTTOM w0.3: U3.10 18.06,78.66 14.04,74.64 R8.2 6.9,80.54 R9.1
N05183: length 62.7
  BOTTOM w0.3: v1(117.82,63.4) 112.34,63.4 109.56,66.18 101.48,66.18 99.61,64.31 69.01,64.31 U5.1 ; U4.9 v1(117.82,71.02)
N05210: length 53.5
  BOTTOM w0.3: U5.3 60.41,60.79 63.8,60.79 67.87,64.86 97.2,64.86 U4.7
N05222: length 59.6
  BOTTOM w0.3: U5.5 55.88,61.34 63.57,61.34 67.64,65.42 95.22,65.42 U4.6
N05234: length 80.6
  BOTTOM w0.3: v1(67,60.6) 64.77,58.37 64.77,57.97 60.1,53.3 52.92,53.3 U5.9 ; U4.14 113.52,83.83 111.8,85.55 111.8,85.78 107.06,90.52 100.98,90.52 93.75,83.29 93.75,78.72 85.79,70.76 v1(67,70.76)
N05246: length 47.6
  BOTTOM w0.3: U5.2 57.26,55.1 53.07,55.1 49.53,51.55 49.53,50.8 48.84,50.11 47.12,50.11 34.89,62.34 25.17,62.34 23.45,60.62 U7.10
N05283: length 68.6
  BOTTOM w0.3: U7.7 18.79,57.55 12.06,57.55 9.47,60.14 9.47,61.1 11.82,63.45 35.35,63.45 41.62,57.18 54.26,57.18 U5.4
N05295: length 57.9
  BOTTOM w0.3: U5.6 49.73,57.73 41.91,57.73 36.17,63.47 35.79,63.85 35.63,64 9.83,64 6.93,61.1 6.93,56.71 U7.2
N05307: length 43.5
  BOTTOM w0.3: U5.8 46.74,51.28 35.12,62.89 12.91,62.89 U7.15
N05494: length 140.5
  BOTTOM w0.3: U9.1 127.8,4.4 74.44,4.4 43.27,35.56 33.52,35.56 30.86,38.22 30.86,38.29 24.1,45.05 20.12,45.05 13.18,51.99 U7.3
N05551: length 23.4
  BOTTOM w0.3: U7.11 23.32,58.1 25.48,58.1 37.59,45.99 U6.11
N05553: length 20.5
  BOTTOM w0.3: U6.12 38.87,45.79 25.88,58.78 U7.9
N05555: length 47.3
  BOTTOM w0.3: U7.1 8.1,48.4 18.82,37.68 v1(29.4,37.68) ; U6.13 40.13,47.27 v1(29.4,58)
N05557: length 40.1
  BOTTOM w0.3: U6.14 41.41,48.59 28.21,61.79 25.4,61.79 24.51,60.9 24.51,60.14 23.82,59.45 22.86,59.45 22,60.31 22,61.07 21.28,61.79 14.35,61.79 U7.14
N06357: length 25.4
  BOTTOM w0.3: VR1.2 32.12,18.18 37.4,12.9 43.7,12.9 44.16,12.44 U1.7 44.16,9.94 44.36,9.74 R1.2
N06361: length 33.9
  BOTTOM w0.3: 43.8,14.8 37.1,14.8 32.55,19.35 30.25,19.35 28.3,17.4 VR1.1 ; 43.8,14.8 44.1,15.1 44.1,16.11 U1.2 44.16,18.27 45,19.1 C1.1 ; 43.8,14.8 44,14.8 45.44,13.37 45.44,11.22
N07130: length 65.8
  BOTTOM w0.3: U8.13 125.4,45.9 125.4,43.8 128.57,40.63 145.24,40.63 146.76,39.11 146.76,23.23 136.61,13.08 U9.3
N07335: length 13.7
  BOTTOM w0.3: U8.9 119.78,59.58 R18.1 114.8,52.09 115.4,51.49 C3.2
N07588: length 11.8
  BOTTOM w0.3: C2.1 55.7,12.8 47.24,12.8 46.7,12.26 U1.5
N08311: length 14.5
  BOTTOM w0.3: U6.6 37.59,38.99 38.19,38.4 v1(38.9,38.4) ; U6.10 36.35,45.5 36.35,45.7 35.54,46.52 34.11,46.52 33.32,45.72 33.32,38.9 v1(33.82,38.4)
N11638: length 15.1
  BOTTOM w0.3: R19.1 108.2,43.2 C4.1 99.6,43.2 U10.1
N11666: length 180.9
  BOTTOM w0.3: C4.2 103.2,51.99 103.1,52.09 R20.1 101.93,54.1 101.91,54.12 U10.4 94.9,52.72 94.9,50.5 93.91,49.51 91.33,49.51 90,50.84 90,55.55 90.4,55.95 90.4,57.37 90,57.77 90,59.53 89.16,60.37 87.43,60.37 85.58,62.22 74.88,62.22 74.33,62.77 72.28,62.77 62.43,52.93 62.43,50.8 63.12,50.11 64.08,50.11 65.3,51.33 65.3,53.95 72.82,61.47 73.78,61.47 80.39,54.86 80.39,35.78 95.55,20.62 95.55,9.22 94.86,8.53 88.82,8.53 88.13,9.22 88.13,10.77 85.4,13.5 85.4,17.79 78.29,24.9 73.2,24.9 U11.14
N11691: length 18.3
  BOTTOM w0.3: U10.5 U10.6 98.04,59.2 R20.2 108.76,64.26 C5.2
N11734: length 18.8
  BOTTOM w0.3: C5.1 109.6,53.7 109.5,53.6 R19.2 107.09,49.65 98.23,49.65 U10.3
N11895: length 21.3
  BOTTOM w0.3: U12.15 73.61,22.85 67.63,22.85 U11.11
N11956: length 44.1
  BOTTOM w0.3: U11.5 64.84,35.62 61.72,32.5 59.89,32.5 56.05,28.66 56.05,27.7 61.95,21.8 73.77,21.8 77.97,17.59 77.97,16.84 78.66,16.15 80.51,16.15 U12.14
N11968: length 30.4
  BOTTOM w0.3: U11.10 60.93,29.35 62.78,29.35 63.47,28.66 63.47,27.91 67.97,23.4 78.14,23.4 U12.13
N11980: length 54.3
  BOTTOM w0.3: U10.8 87.36,61.74 85.77,63.33 74.56,63.33 71.46,63.33 59.89,51.76 59.89,47.81 69.92,37.78 U11.3
N12001: length 77.7
  BOTTOM w0.3: 82.6,52.7 82.6,55.59 82.5,55.69 R21.2 ; 82.6,52.7 86.26,49.04 U10.13 ; 82.6,52.7 82.6,52 81.33,50.73 81.33,35.62 96.1,20.85 96.1,8.99 95.09,7.98 83.4,7.98 U12.3
N12045: length 6
  BOTTOM w0.3: U10.10 87.51,55.49 87.51,52.75 U10.12
N12067: length 11.7
  BOTTOM w0.3: R22.2 86.41,60.3 87.51,59.2 U10.9 89.45,58.43 89.45,57.54 89.85,57.14 89.85,56.18 89.45,55.78 89.45,54.89 U10.11
N12155: length 8.7
  BOTTOM w0.3: Q1.1 75.2,58.4 R22.1
N14271: length 75.5
  BOTTOM w0.3: U9.10 104.63,18.16 96.87,25.92 96.87,34.3 95.98,35.19 95.02,35.19 94.52,34.69 88.51,34.69 88.09,35.11 88.09,35.69 89.25,36.85 110.45,36.85 U13.9
N14317: length 10.8
  BOTTOM w0.3: U9.4 U9.8

## Copper pours and planes (outline as drawn; the poured copper is in the pictures)
GND on BOTTOM (solid shape): 56.04,73.66 57.02,73.66 57.37,73.31 57.39,73.2 57.3,73.14 56.04,73.14 56.04,71.62 55.7,71.62 54.7,72.61 54.08,72.61 53.99,72.67 54,72.78 54.2,73.32 54.06,73.89 54.06,73.99 54.15,74.04 56.04,74.04
GND on BOTTOM (solid shape): 103.04,35.16 103.05,35.14 103.05,35.11 103.04,35.08 103.02,35.06 103,35.04 102.92,35.02 102.83,35 102.74,34.97 102.66,34.93 102.58,34.88 102.51,34.83 102.44,34.78 102.37,34.71 102.31,34.64 102.26,34.57 102.22,34.49 102.18,34.41 102.15,34.32 102.13,34.24 102.11,34.15 102.1,34.06 102.1,33.97 102.11,33.88 102.13,33.79 102.15,33.7 102.19,33.62 102.22,33.54 102.27,33.46 102.32,33.38 102.38,33.32 102.45,33.25 102.52,33.2 102.59,33.15 102.67,33.1 102.76,33.07 102.84,33.04 102.93,33.02 103.02,33.01 103.11,33 103.2,33.01 103.29,33.02 103.38,33.04 103.46,33.06 103.55,33.1 103.63,33.14 103.7,33.19 103.78,33.24 103.85,33.3 109.71,27.44 109.71,26.85 109.79,26.77 109.77,26.7 109.74,26.61 109.73,26.52 109.72,26.43 109.72,26.34 109.73,26.25 109.75,26.16 109.77,26.08 109.81,25.99 109.85,25.91 109.89,25.83 109.95,25.76 110.01,25.69 110.07,25.63 110.15,25.57 110.22,25.52 110.3,25.48 110.38,25.45 110.47,25.42 110.56,25.4 110.65,25.39 110.74,25.38 110.83,25.39 110.92,25.4 111.01,25.42 111.1,25.45 111.18,25.48 111.26,25.52 111.33,25.57 111.41,25.63 111.47,25.69 111.53,25.76 111.59,25.83 111.63,25.91 111.67,25.99 111.71,26.08 111.73,26.16 111.75,26.25 111.76,26.34 111.76,26.4 112.26,26.4 112.27,26.31 112.28,26.22 112.3,26.13 112.32,26.05 112.36,25.96 112.4,25.88 112.45,25.81 112.51,25.74 112.57,25.67 112.63,25.61 112.71,25.56 112.78,25.51 112.86,25.47 112.95,25.44 113.03,25.41 113.12,25.39 113.21,25.38 113.3,25.38 113.39,25.39 113.48,25.4 113.57,25.42 113.65,25.45 113.74,25.49 113.82,25.53 113.89,25.58 113.96,25.64 114.02,25.7 114.08,25.77 114.13,25.85 114.18,25.92 114.22,26.01 114.25,26.09 114.27,26.18 114.29,26.27 114.3,26.35 114.3,26.45 114.29,26.53 114.27,26.62 114.25,26.71 114.22,26.79 114.18,26.88 114.13,26.95 114.08,27.03 114.02,27.1 113.96,27.16 113.89,27.22 113.82,27.27 113.74,27.31 113.65,27.35 113.57,27.38 113.48,27.4 113.39,27.41 113.3,27.42 113.21,27.42 113.12,27.41 113.03,27.39 112.95,27.36 112.86,27.33 112.78,27.29 112.71,27.24 112.63,27.19 112.57,27.13 112.51,27.06 112.45,26.99 112.4,26.92 112.36,26.84 112.32,26.75 112.3,26.67 112.28,26.58 112.27,26.49 112.26,26.4 111.76,26.4 111.76,26.43 111.75,26.52 111.74,26.61 111.71,26.7 111.69,26.77 112.75,27.83 141.57,27.83 141.59,27.78 141.64,27.69 141.69,27.6 141.7,27.58 141.69,27.55 141.68,27.52 141.66,27.5 141.63,27.49 141.59,27.48 141.41,27.48 135.03,21.11 132.33,21.11 132.32,21.15 132.27,21.23 132.22,21.3 132.17,21.37 132.1,21.44 132.04,21.5 131.96,21.55 131.89,21.6 131.8,21.63 131.72,21.67 131.63,21.69 131.55,21.71 131.46,21.72 131.37,21.72 131.28,21.71 131.19,21.7 131.1,21.67 131.03,21.65 129.43,23.24 130.38,23.24 130.39,23.15 130.4,23.06 130.42,22.97 130.44,22.89 130.48,22.8 130.52,22.72 130.57,22.65 130.63,22.58 130.69,22.51 130.75,22.45 130.83,22.4 130.9,22.35 130.98,22.31 131.07,22.28 131.15,22.25 131.24,22.23 131.33,22.22 131.42,22.22 131.51,22.23 131.6,22.24 131.69,22.26 131.77,22.29 131.86,22.33 131.94,22.37 132.01,22.42 132.08,22.48 132.14,22.54 132.2,22.61 132.25,22.69 132.3,22.76 132.34,22.85 132.37,22.93 132.39,23.02 132.41,23.11 132.42,23.19 132.42,23.29 132.41,23.37 132.39,23.46 132.37,23.55 132.34,23.63 132.3,23.72 132.25,23.79 132.2,23.87 132.14,23.94 132.08,24 132.01,24.06 131.94,24.11 131.86,24.15 131.77,24.19 131.69,24.22 131.6,24.24 131.51,24.25 131.42,24.26 131.33,24.26 131.24,24.25 131.15,24.23 131.07,24.2 130.98,24.17 130.9,24.13 130.83,24.08 130.75,24.03 130.69,23.97 130.63,23.9 130.57,23.83 130.52,23.76 130.48,23.68 130.44,23.59 130.42,23.51 130.4,23.42 130.39,23.33 130.38,23.24 129.43,23.24 126.2,26.47 119.92,26.47 118.33,24.89 107.75,24.89 106.61,26.03 106.63,26.1 106.66,26.19 106.67,26.27 106.68,26.36 106.68,26.4 107.18,26.4 107.19,26.31 107.2,26.22 107.22,26.13 107.24,26.05 107.28,25.96 107.32,25.88 107.37,25.81 107.43,25.74 107.49,25.67 107.55,25.61 107.63,25.56 107.7,25.51 107.78,25.47 107.87,25.44 107.95,25.41 108.04,25.39 108.13,25.38 108.22,25.38 108.31,25.39 108.4,25.4 108.49,25.42 108.57,25.45 108.66,25.49 108.74,25.53 108.81,25.58 108.88,25.64 108.94,25.7 109,25.77 109.05,25.85 109.1,25.92 109.14,26.01 109.17,26.09 109.19,26.18 109.21,26.27 109.22,26.35 109.22,26.45 109.21,26.53 109.19,26.62 109.17,26.71 109.14,26.79 109.1,26.88 109.05,26.95 109,27.03 108.94,27.1 108.88,27.16 108.81,27.22 108.74,27.27 108.66,27.31 108.57,27.35 108.49,27.38 108.4,27.4 108.31,27.41 108.22,27.42 108.13,27.42 108.04,27.41 107.95,27.39 107.87,27.36 107.78,27.33 107.7,27.29 107.63,27.24 107.55,27.19 107.49,27.13 107.43,27.06 107.37,26.99 107.32,26.92 107.28,26.84 107.24,26.75 107.22,26.67 107.2,26.58 107.19,26.49 107.18,26.4 106.68,26.4 106.68,26.45 106.67,26.54 106.65,26.63 106.63,26.72 106.6,26.8 106.56,26.88 106.51,26.96 106.46,27.03 106.4,27.1 106.34,27.16 106.27,27.22 106.2,27.27 106.12,27.31 106.04,27.35 105.95,27.38 105.86,27.4 105.78,27.41 105.69,27.42 105.6,27.42 105.51,27.41 105.42,27.39 105.34,27.37 105.25,27.33 105.17,27.29 105.1,27.25 105.02,27.19 104.96,27.14 104.89,27.07 104.86,27.03 104.83,27.01 104.81,27 104.78,27 104.75,27.01 104.72,27.02 104.71,27.03 103.77,27.97 99.04,27.97 98.41,27.35 98.34,27.37 98.25,27.4 98.16,27.41 98.08,27.42 97.99,27.42 97.9,27.41 97.81,27.39 97.72,27.37 97.64,27.34 97.56,27.3 97.48,27.25 97.4,27.21 97.38,27.2 97.35,27.21 97.32,27.22 97.3,27.24 97.29,27.27 97.28,27.31 97.28,28.74 98.94,28.74 98.94,30.86 97.28,30.86 97.28,33.11 97.29,33.16 97.3,33.18 97.32,33.2 97.35,33.21 97.38,33.22 97.4,33.21 97.48,33.17 97.56,33.12 97.64,33.08 97.72,33.05 97.81,33.03 97.89,33.01 97.98,33 98.07,33 98.16,33.01 98.25,33.02 98.34,33.05 98.42,33.08 98.5,33.11 98.58,33.16 98.66,33.21 98.72,33.27 98.79,33.33 98.85,33.4 98.9,33.47 98.94,33.55 98.98,33.63 99.01,33.71 99.03,33.8 99.05,33.89 99.06,33.98 99.06,34.02 99.56,34.02 99.57,33.93 99.58,33.84 99.6,33.75 99.62,33.67 99.66,33.58 99.7,33.5 99.75,33.43 99.81,33.36 99.87,33.29 99.93,33.23 100.01,33.18 100.08,33.13 100.16,33.09 100.25,33.06 100.33,33.03 100.42,33.01 100.51,33 100.6,33 100.69,33.01 100.78,33.02 100.87,33.04 100.95,33.07 101.04,33.11 101.12,33.15 101.19,33.2 101.26,33.26 101.32,33.32 101.38,33.39 101.43,33.47 101.48,33.54 101.52,33.63 101.55,33.71 101.57,33.8 101.59,33.89 101.6,33.97 101.6,34.07 101.59,34.15 101.57,34.24 101.55,34.33 101.52,34.41 101.48,34.5 101.43,34.57 101.38,34.65 101.32,34.72 101.26,34.78 101.19,34.84 101.12,34.89 101.04,34.93 100.95,34.97 100.87,35 100.78,35.02 100.69,35.03 100.6,35.04 100.51,35.04 100.42,35.03 100.33,35.01 100.25,34.98 100.16,34.95 100.08,34.91 100.01,34.86 99.93,34.81 99.87,34.75 99.81,34.68 99.75,34.61 99.7,34.54 99.66,34.46 99.62,34.37 99.6,34.29 99.58,34.2 99.57,34.11 99.56,34.02 99.06,34.02 99.06,34.07 99.05,34.16 99.03,34.24 99.01,34.33 98.98,34.41 98.94,34.5 98.9,34.57 98.84,34.65 98.79,34.71 98.72,34.78 98.65,34.83 98.58,34.88 98.5,34.93 98.42,34.97 98.33,34.99 98.25,35.02 98.16,35.03 98.07,35.04 97.98,35.04 97.89,35.03 97.8,35.01 97.72,34.99 97.63,34.95 97.55,34.91 97.48,34.87 97.4,34.82 97.34,34.76 97.27,34.69 97.24,34.65 97.21,34.63 97.19,34.62 97.16,34.62 97.13,34.63 97.1,34.64 97.09,34.65 96.58,35.16 96.57,35.17 96.56,35.2 96.55,35.23 96.56,35.26 96.57,35.28 96.59,35.31 96.61,35.32 96.64,35.33 96.66,35.33 102.88,35.33
GND on BOTTOM (solid shape): outline of 2389 points within 5.39,8.98 114.18,80.16
(no net) on BOTTOM: 5,5 5,95 155,95 155,5 ; 96 cut-outs
